# EAGLE board 4 Bit To 2 Digit Display (EAGLE 7.6.0)

Size 55 x 47 mm. Coordinates in mm from the lower left corner, seen from the top.
Outline: 0,0 55,0 55,47 0,47 0,0
Copper layers (1*16): Top 0.035mm / dielectric 1.5mm / Bottom 0.035mm
Design rules "default": minimum track width 10mil, minimum drill 24mil, track to track 8mil, track to pad 8mil, pad to pad 8mil, via to via 8mil, smd to smd 8mil, copper to edge 40mil, drill to drill 8mil, minimum pad ring 10mil, minimum via ring 8mil, stop-mask expansion 4mil, vias tented up to drill 0mil, thermal gap 10mil

## Footprints (pad centres in the part's own frame; a part is rotated, then mirrored left to right if it is on the bottom)
DIL24-6 = drill 0.813 long: 1 -13.97,-7.62; 2 -11.43,-7.62; 3 -8.89,-7.62; 4 -6.35,-7.62; 5 -3.81,-7.62; 6 -1.27,-7.62; 7 1.27,-7.62; 8 3.81,-7.62; 9 6.35,-7.62; 10 8.89,-7.62; 11 11.43,-7.62; 12 13.97,-7.62; 13 13.97,7.62; 14 11.43,7.62; 15 8.89,7.62; 16 6.35,7.62; 17 3.81,7.62; 18 1.27,7.62; 19 -1.27,7.62; 20 -3.81,7.62; 21 -6.35,7.62; 22 -8.89,7.62; 23 -11.43,7.62; 24 -13.97,7.62
7SEG-13 = drill 0.813 long: 1 -5.08,-7.62; 2 -2.54,-7.62; 3 0,-7.62; 4 2.54,-7.62; 5 5.08,-7.62; 6 5.08,7.62; 7 2.54,7.62; 8 0,7.62; 9 -2.54,7.62; 10 -5.08,7.62
DIL16 = drill 0.813 long: 1 -8.89,-3.81; 2 -6.35,-3.81; 3 -3.81,-3.81; 4 -1.27,-3.81; 5 1.27,-3.81; 6 3.81,-3.81; 7 6.35,-3.81; 8 8.89,-3.81; 9 8.89,3.81; 10 6.35,3.81; 11 3.81,3.81; 12 1.27,3.81; 13 -1.27,3.81; 14 -3.81,3.81; 15 -6.35,3.81; 16 -8.89,3.81
1X10-BIG = drill 1.016 pad 1.778 octagon: 1 -11.43,0; 2 -8.89,0; 3 -6.35,0; 4 -3.81,0; 5 -1.27,0; 6 1.27,0; 7 3.81,0; 8 6.35,0; 9 8.89,0; 10 11.43,0
R1206 = smd 1.6 x 1.803: 1 -1.422,0; 2 1.422,0

## Placement (x,y rotation side)
28C16A_EEPROM  28C16AP  [DIL24-6]  39,29 270 top
DIGIT_0  [7SEG-13]  21,36 0 top
DIGIT_0_74LS47  74LS47N  [DIL16]  13,18 0 top
DIGIT_1  [7SEG-13]  7,36 0 top
INPUTS  PINHD-1X10  [1X10-BIG]  27.83,1.5 180 top
OUTPUTS  PINHD-1X10  [1X10-BIG]  53,22 90 top
R_100O_0  [R1206]  6.5,4.5 180 top
R_100O_1  [R1206]  47,4.5 180 top

## Library data of the parts
28C16A_EEPROM = microchip; MPN: CAT28C16ALI-12; OC_FARNELL: 1718292; OC_NEWARK: 06R0648
DIGIT_0 DIGIT_1 = special
DIGIT_0_74LS47 = 74xx-eu
INPUTS OUTPUTS R_100O_0 R_100O_1 = adafruit

## Nets
BIT0: 28C16A_EEPROM.8 INPUTS.4 OUTPUTS.4
BIT1: 28C16A_EEPROM.7 INPUTS.3 OUTPUTS.3
BIT2: 28C16A_EEPROM.6 INPUTS.2 OUTPUTS.2
BIT3: 28C16A_EEPROM.5 INPUTS.1 OUTPUTS.1
D0: 28C16A_EEPROM.9 DIGIT_0_74LS47.7
D1: 28C16A_EEPROM.10 DIGIT_0_74LS47.1
D2: 28C16A_EEPROM.11 DIGIT_0_74LS47.2
D3: 28C16A_EEPROM.13 DIGIT_0_74LS47.6
D5: 28C16A_EEPROM.14 DIGIT_1.4 DIGIT_1.6
DIGIT_0_A: DIGIT_0.7 DIGIT_0_74LS47.13
DIGIT_0_B: DIGIT_0.6 DIGIT_0_74LS47.12
DIGIT_0_C: DIGIT_0.4 DIGIT_0_74LS47.11
DIGIT_0_D: DIGIT_0.2 DIGIT_0_74LS47.10
DIGIT_0_E: DIGIT_0.1 DIGIT_0_74LS47.9
DIGIT_0_F: DIGIT_0.9 DIGIT_0_74LS47.15
DIGIT_0_G: DIGIT_0.10 DIGIT_0_74LS47.14
GND: 28C16A_EEPROM.1 28C16A_EEPROM.2 28C16A_EEPROM.3 28C16A_EEPROM.4 28C16A_EEPROM.12 28C16A_EEPROM.18 28C16A_EEPROM.19 28C16A_EEPROM.20 28C16A_EEPROM.22 28C16A_EEPROM.23 DIGIT_0_74LS47.8 INPUTS.10 OUTPUTS.10
N$1: DIGIT_0.8 R_100O_0.2
N$2: DIGIT_1.8 R_100O_1.2
VCC: 28C16A_EEPROM.21 28C16A_EEPROM.24 DIGIT_0_74LS47.3 DIGIT_0_74LS47.4 DIGIT_0_74LS47.5 DIGIT_0_74LS47.16 INPUTS.9 OUTPUTS.9 R_100O_0.1 R_100O_1.1

## Tracks (layer width: path | path; a pad name or v marks a point on that pad's centre or on a via)
BIT0  (2 unrouted)
BIT1  (2 unrouted)
BIT2  (2 unrouted)
BIT3  (2 unrouted)
D0  (1 unrouted)
D1  (1 unrouted)
D2  (1 unrouted)
D3  (1 unrouted)
D5  (2 unrouted)
DIGIT_0_A  (1 unrouted)
DIGIT_0_B  (1 unrouted)
DIGIT_0_C  (1 unrouted)
DIGIT_0_D  (1 unrouted)
DIGIT_0_E  (1 unrouted)
DIGIT_0_F  (1 unrouted)
DIGIT_0_G  (1 unrouted)
GND  (12 unrouted)
N$1  (1 unrouted)
N$2  (1 unrouted)
VCC  (9 unrouted)

## Text on the board
tNames: GND | VCC | 0 | 1 | 2 | 3 | 4 Bit To 2 Digit Display | 4 Bit To 2 Digit Display | BIT: | GND | VCC | BIT: | 0 | 1 | 2 | 3
bNames: PCBv1 2017.08 | MadeInTheUSB.net